# Altium PCB PCB2.PcbDoc
Units mm, origin at the board's own origin, x right, y up, seen from the top; angles counter-clockwise.
Board outline 94.61 x 96.01 mm, 2 copper layers (Top Layer, Bottom Layer); 21 components, 7 nets, 62 pads, 0 vias.
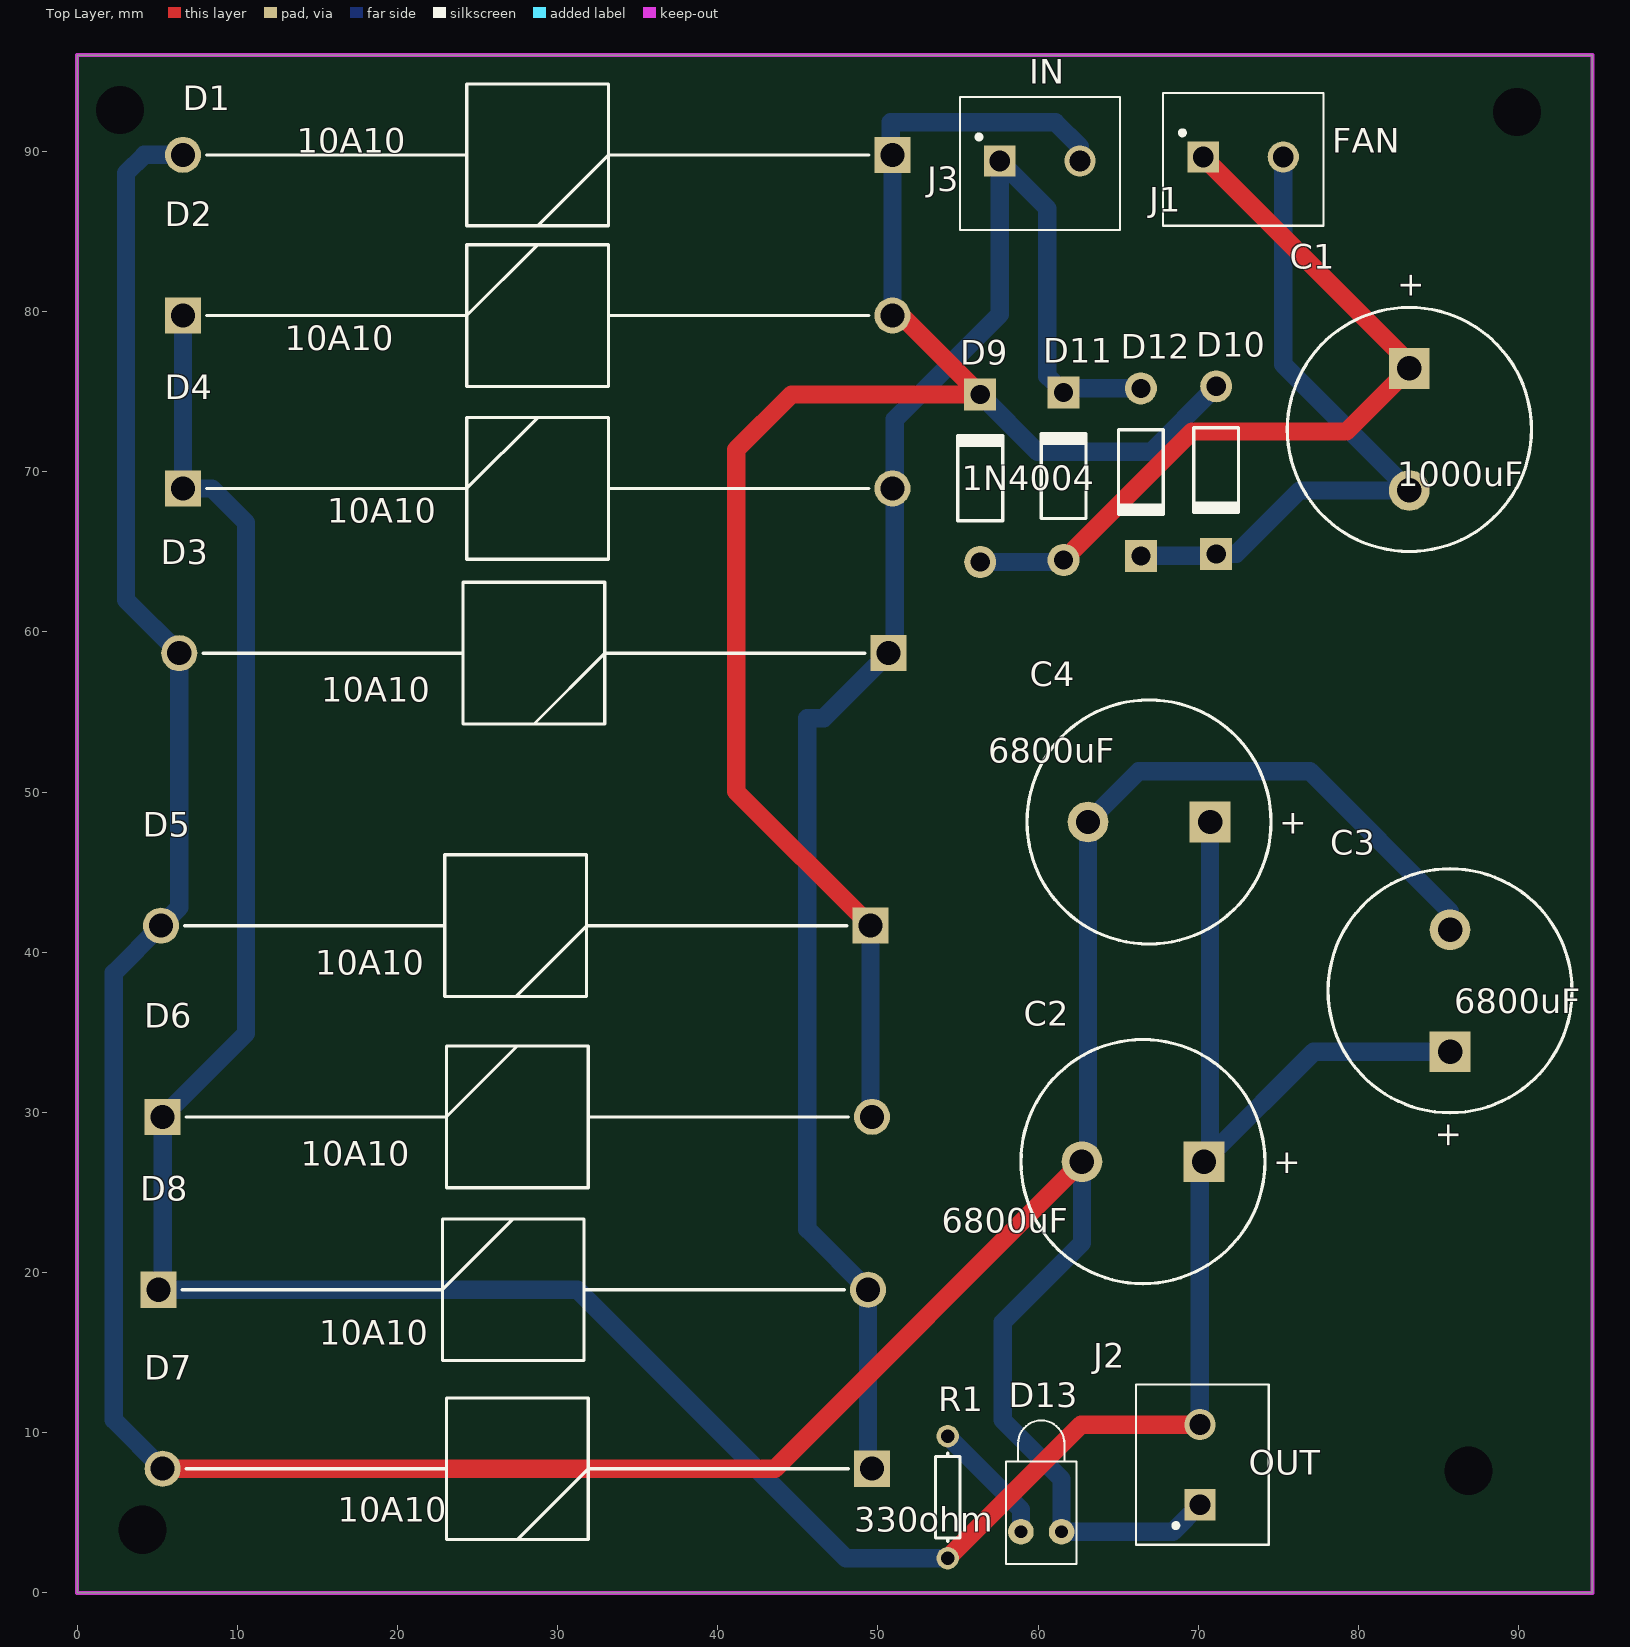
[diagram p0: Top Layer view]
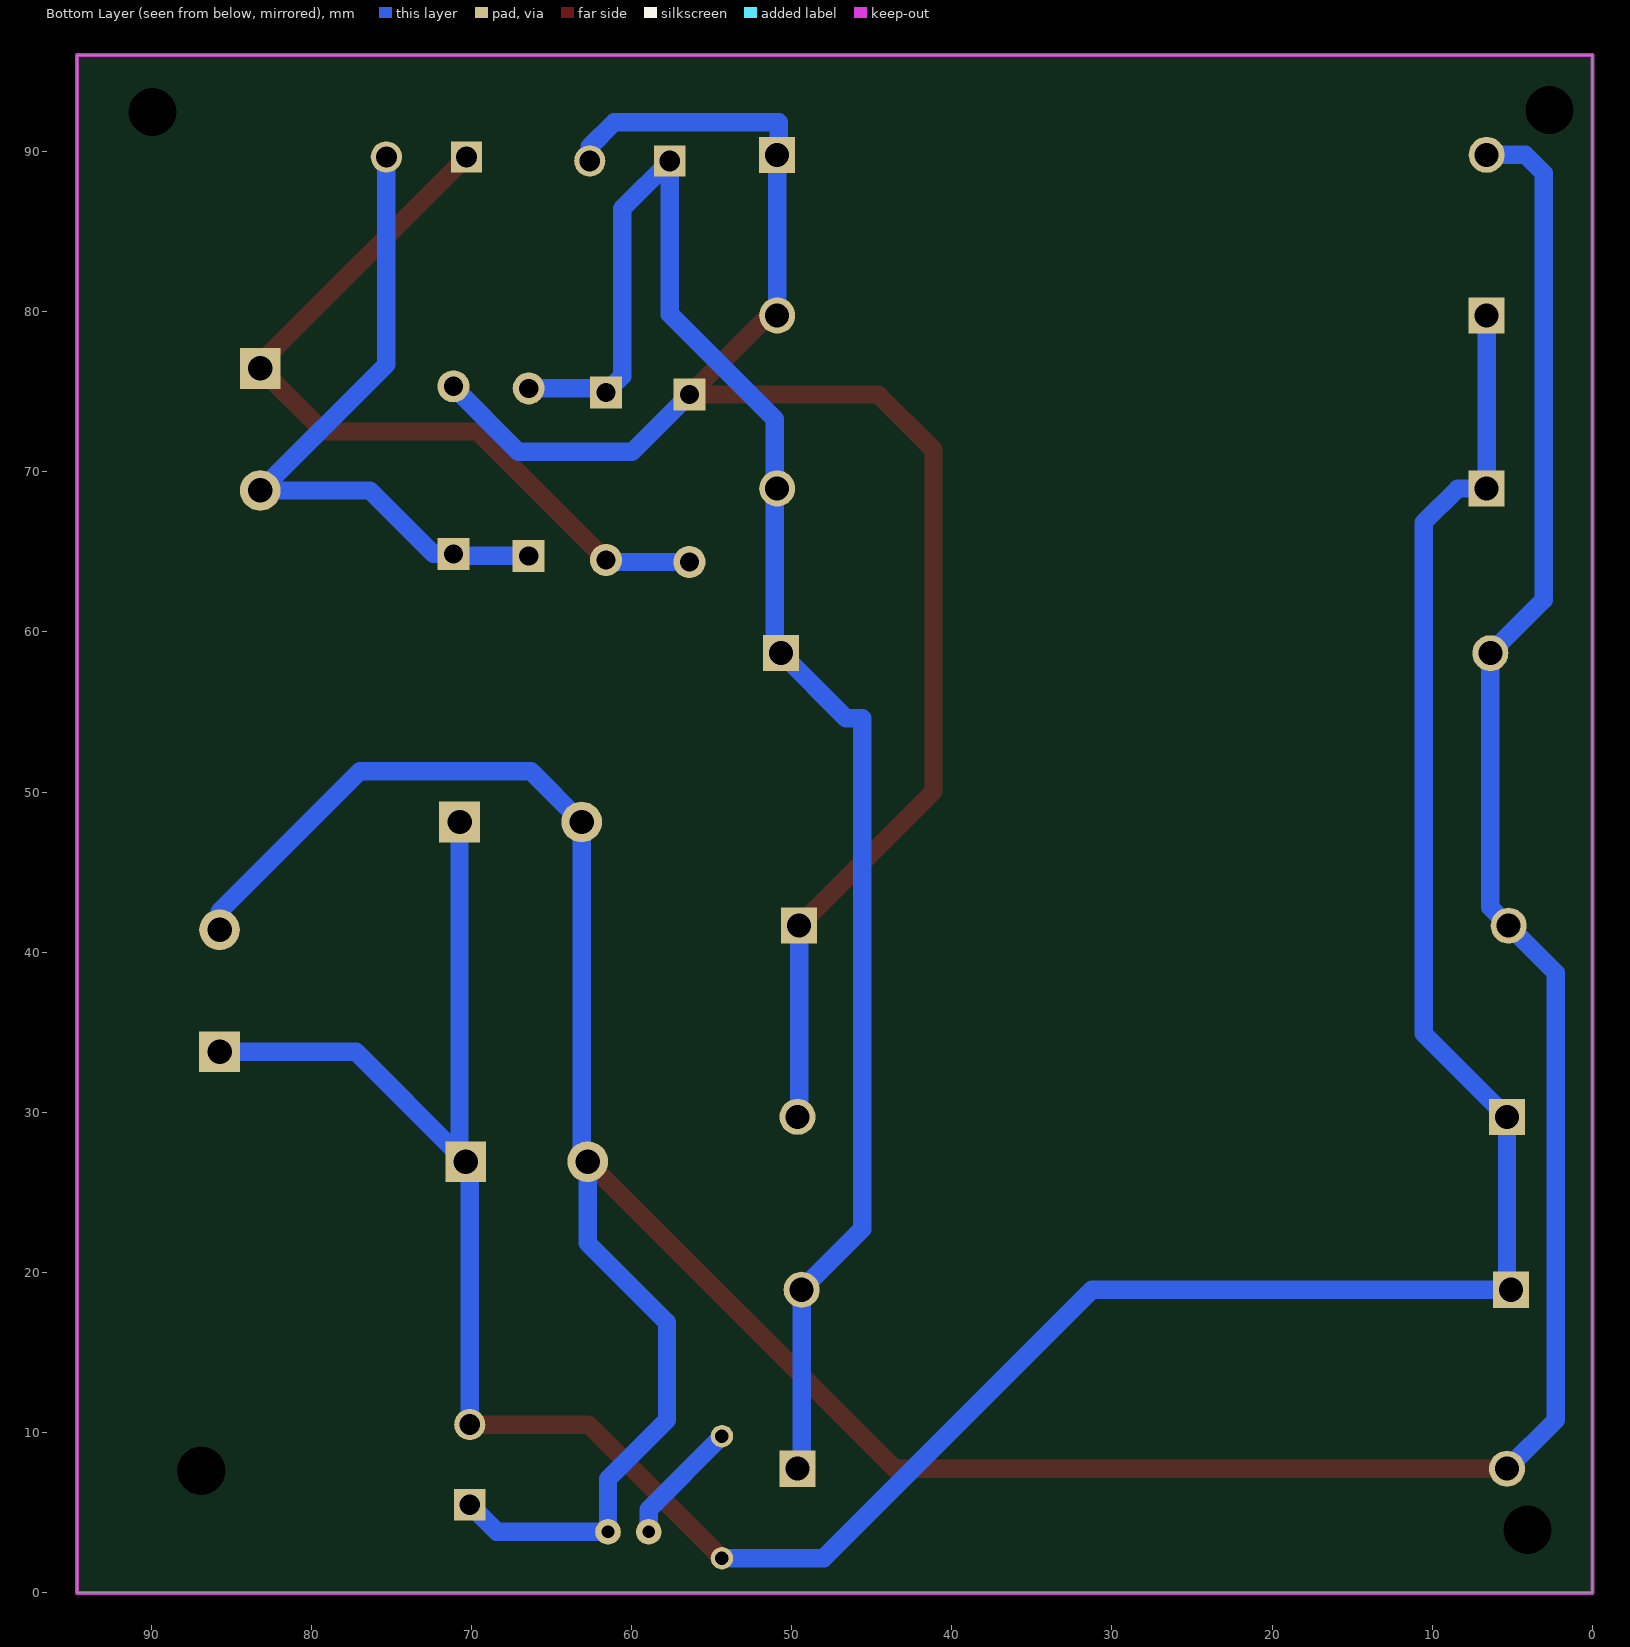
[diagram p1: Bottom Layer view, seen from below]

## Layer stack, top to bottom
Top Solder: solder mask 0.0102, Solder Resist, Dk 3.5
Top Layer: signal copper 0.0356
Dielectric 1: dielectric 0.32, FR-4, Dk 4.8
Bottom Layer: signal copper 0.0356
Bottom Solder: solder mask 0.0102, Solder Resist, Dk 3.5

## Board outline
0,0 94.615,0 94.615,96.012 0,96.012

## Design rules (kind name [scope] priority, off if disabled: settings)
Clearance [All] p1: gap=0.508 ignorepadtopadclearanceinfootprint=FALSE except(0: Arc-Hole Track-Hole SMDPad-Hole THPad-Hole Via-Hole Fill-Hole Poly-Hole Region-Hole Text-Hole)
PolygonConnect [All] p1: connectstyle=Relief reliefconductorwidth=0.254 reliefentries=4 polygonreliefangle="90 Angle" airgapwidth=0.254
RoutingVias [All] p1: holewidth=0.711 width=1.27 viastyle="Through Hole" minholewidth=0.711 minwidth=1.27 maxholewidth=0.711 maxwidth=1.27
SolderMaskExpansion [All] p1: expansion=0.102
Width [All] p1: maxlimit=1.524 minlimit=0.762 preferedwidth=1.143
30 further rules are at their usual default settings.

## Components (designator, comment, footprint, x,y, rotation, side; value= is the part's Value field where it differs from the comment)
C1 "Cap Pol1" RB7.6-15 83.185,72.644 r90 top value=1000uF
C2 "Cap Pol1" RB7.6-15 66.548,26.924 r0 top value=6800uF
C3 "Cap Pol1" RB7.6-15 85.725,37.592 r270 top value=6800uF
C4 "Cap Pol1" RB7.6-15 66.929,48.133 r0 top value=6800uF
D1 "10A01-T" DIOAD4425W130L885D885 50.904,89.789 r180 top
D2 "10A01-T" DIOAD4425W130L885D885 6.604,79.756 r0 top
D3 "10A01-T" DIOAD4425W130L885D885 50.673,58.674 r180 top
D4 "10A01-T" DIOAD4425W130L885D885 6.604,68.961 r0 top
D5 "10A01-T" DIOAD4425W130L885D885 49.53,41.656 r180 top
D6 "10A01-T" DIOAD4425W130L885D885 5.334,29.718 r0 top
D7 "10A01-T" DIOAD4425W130L885D885 49.634,7.747 r180 top
D8 "10A01-T" DIOAD4425W130L885D885 5.08,18.923 r0 top
D9 "Diode 1N4004" DO-41 56.388,69.596 r90 top
D10 "Diode 1N4004" DO-41 71.12,70.104 r270 top
D11 "Diode 1N4004" DO-41 61.595,69.723 r90 top
D12 "Diode 1N4004" DO-41 66.421,69.977 r270 top
D13 "LED" LED-1 60.198,3.81 r90 top
J1 "1935161" *PHOENIX_1935161 72.811,89.662 r0 top
J2 "1935161" *PHOENIX_1935161 70.104,8.001 r90 top
J3 "1935161" *PHOENIX_1935161 60.111,89.408 r0 top
R1 "Res1" AXIAL-0.3 54.356,5.969 r90 top value=330

## Footprints (in the part's own frame and the unit in brackets; to place one, negate y for a bottom-side part, rotate by r counter-clockwise, add the part's x,y. Pads: shape width x height; smd on the part's side, far side on the other; paste and mask are expansions set on the pad)
*PHOENIX_1935161 [mm]
  rect 1.95x1.95 hole 1.3: 1(-2.5,0)
  round 1.95 hole 1.3: 2(2.5,0)
  silkscreen extent -5,-4.3 5,4
AXIAL-0.3 [mm] "Axial Device, Thru-Hole; 2 Leads; 0.3 in Pin Spacing"
  round 1.4 hole 0.85: 1(-3.81,0) 2(3.81,0)
  silkscreen extent -2.77,-0.76 2.77,0.76
DIOAD4425W130L885D885 [mm]
  rect 2.25x2.25 hole 1.5: 1(0,0)
  round 2.25 hole 1.5: 2(44.3,0)
  silkscreen extent 1.48,-4.43 42.82,4.43
DO-41 [mm] "Diode, Axial; Body 5.2 x 2.7 mm (LxDia. max), Lead Dia. 0.86 mm (max)"
  round 2 hole 1.2: 1(-5.23,0)
  rect 2x2 hole 1.2: 2(5.23,0)
  silkscreen extent -2.65,-1.4 2.75,1.4
LED-1 [mm] "LED; 2 Leads"
  round 1.6 hole 0.8: 1(0,1.27) 2(0,-1.27)
  silkscreen extent -2,-2.2 6.95,2.2
RB7.6-15 [mil] "Polarized Capacitor (Radial); 2 Leads"
  rect 100x100 hole 60: 1(150,0)
  round 100 hole 60: 2(-150,0)
  silkscreen extent -300,-300 300,300

## Part data
C1 C2 C3 C4: "Polarized Capacitor (Radial)", LatestRevisionDate=17-Jul-2002, LatestRevisionNote="Re-released for DXP Platform.", PackageDescription="Polarized Capacitor (Radial); 2 Leads", PackageReference=RB7.6-15, Published=8-Jun-2000, Publisher="Altium Limited"
D1 D2 D3 D4 D5 D6 D7 D8: "Diode", Manufacturer_Name="Diodes Inc.", Mouser Part Number=621-10A01-T, RS Part Number=9228248, Allied_Number=70437181, Allied Price/Stock=https://www.alliedelec.com/diodes-inc-10a01-t/70437181/, Datasheet Link=https://componentsearchengine.com/Datasheets/1/10A01-T.pdf, Manufacturer_Part_Number=10A01-T, Mouser Price/Stock=https://www.mouser.com/Search/Refine.aspx?Keyword=621-10A01-T, RS Price/Stock=http://uk.rs-online.com/web/p/products/9228248
D9 D10 D11 D12: "1 Amp General Purpose Rectifier", Code_JEDEC=DO-204-AL, ComponentLink1Description="Manufacturer Link", ComponentLink1URL=http://www.fairchildsemi.com/, ComponentLink2Description=Datasheet, ComponentLink2URL=http://www.fairchildsemi.com/ds/1N%2F1N4001.pdf, DatasheetVersion=1998, LatestRevisionDate=17-Jul-2002, LatestRevisionNote="Re-released for DXP Platform.", PackageDescription="Diode, Axial; Body 5.2 x 2.7 mm (LxDia. max), Lead Dia. 0.86 mm (max)", PackageReference=DO-41, PackageVersion=Aug-1999, Published=8-Jun-2000, Publisher="Altium Limited"
D13: library part LED1, "Typical RED GaAs LED", LatestRevisionDate=08-Jul-2005, LatestRevisionNote="Mech Layer 1 removed.", PackageDescription="LED; 2 Leads", PackageReference=LED-1, Published=8-Jun-2000, Publisher="Altium Limited"
J1 J2 J3: "Conn Terminal Blocks 2 POS 5mm Solder ST Thru-Hole 16A", Package=None, Availability=Unavailable, MF="Phoenix Contact", MP=1935161, Price=None, SnapEDA_Link=https://www.snapeda.com/parts/1935161/Phoenix%20Contact/view-part/?ref=snap
R1: "Resistor", LatestRevisionDate=17-Jul-2002, LatestRevisionNote="Re-released for DXP Platform.", PackageDescription="Axial Device, Thru-Hole; 2 Leads; 0.3 in Pin Spacing", PackageReference=AXIAL-0.3, Published=8-Jun-2000, Publisher="Altium Limited"

## Free pads (board coordinates)
  round 1.524 hole 3: 2(2.667,92.583) 3(4.064,3.937) 4(86.868,7.62) 5(89.916,92.456)
  round 2 hole 1.5: 6(6.604,89.789) 7(6.604,79.756)
  round 1.524 hole 0.762: 8(6.604,68.961) 11(5.334,29.718) 12(5.08,18.923) 13(5.334,7.747) 15(49.38,18.923) 16(49.634,29.718) 18(50.673,58.674) 19(50.904,68.961) 20(50.904,79.756) 21(50.904,89.789)
  round 1.524 hole 1.5: 9(6.373,58.674) 10(5.23,41.656) 14(49.634,7.747) 17(49.53,41.656)

## Nets (pads, with @x,y where several pads share a name; then routed paths per layer and width w, separated by ;. In a path a pad name is that pad's centre, name@x,y a point inside that pad or via, vN(x,y) a via of type N, cw(c..) or ccw(c..) an arc to the next point about the centre after c; other vN are vias at no path point)
NetC1_1: C1.1 D9.1 D11.1 J1.1 | length 50.7
  Top Layer w1.143: D11.1 69.619,72.517 79.248,72.517 C1.1 83.185,76.788 J1.1
  Bottom Layer w1.143: D9.1 61.468,64.366 D11.1 ; J1.1@70.311,89.328 J1.1
NetC1_2: C1.2 D10.2 D12.2 J1.2 | length 42.5
  Bottom Layer w1.143: D12.2 70.993,64.747 D10.2 72.367,64.874 76.327,68.834 C1.2 75.311,76.708 J1.2
NetC2_1: C2.1 C3.1 C4.1 D2.1 D4.1 D6.1 D8.1 J2.2 pad.7 pad.8 pad.11 pad.12 R1.1 | length 196.8
  Top Layer w1.143: R1.1 62.698,10.501 J2.2
  Bottom Layer w1.143: pad.7 pad.8 8.405,68.961 10.541,66.825 10.541,34.925 pad.11 5.334,19.177 pad.12 31.242,18.923 48.006,2.159 R1.1 ; J2.2 70.104,26.67 C2.1 C2.1@70.739,27.305 ; C4.1 C2.1@70.739,27.305 ; C3.1 77.216,33.782 C2.1@70.739,27.305
NetC2_2: C2.2 C3.2 C4.2 D1.2 D3.2 D5.2 D7.2 D13.2 J2.1 pad.6 pad.9 pad.10 pad.13 | length 240.8
  Top Layer w1.143: pad.13 43.561,7.747 C2.2
  Bottom Layer w1.143: pad.13 2.286,10.795 2.286,38.712 pad.10 6.373,42.799 pad.9 3.048,61.999 3.048,88.646 4.191,89.789 pad.6 ; D13.2@61.468,3.692 D13.2 ; J2.1 68.413,3.81 D13.2 ; C3.2 85.725,42.545 76.962,51.308 66.294,51.308 C4.2 63.119,27.305 C2.2 62.738,21.844 57.785,16.891 57.785,10.795 61.468,7.112 D13.2
NetD1_1: D1.1 D2.2 D5.1 D6.2 D9.2 D10.1 J3.2 pad.16 pad.17 pad.20 pad.21 | length 112.7
  Top Layer w1.143: pad.17 41.148,50.038 41.148,71.374 44.6,74.826 D9.2 51.458,79.756 pad.20
  Bottom Layer w1.143: pad.17 49.53,29.822 pad.16 ; pad.20 pad.21 50.8,89.893 50.8,91.821 61.087,91.821 62.611,90.297 J3.2 ; D9.2 59.967,71.247 67.056,71.247 71.12,75.311 D10.1
NetD3_1: D3.1 D4.2 D7.1 D8.2 D11.2 D12.1 J3.1 pad.14 pad.15 pad.18 pad.19 | length 109.9
  Bottom Layer w1.143: pad.14 49.38,8.001 pad.15 45.593,22.71 45.593,54.61 46.609,54.61 pad.18 51.054,59.055 51.054,73.279 57.611,79.836 J3.1 60.579,86.44 60.579,75.969 D11.2 61.849,75.207 D12.1
NetD13_1: D13.1 R1.2 | length 7.9
  Bottom Layer w1.143: R1.2 58.928,5.207 D13.1

## Keep-outs
Keep-Out Layer:
  the board outline again, w0.254

## Silkscreen, mask and mechanical layers (free items; w line width, h text height)
Top Overlay:
  text "IN" at 59.436,94.234 h1.52
  text "10A10" at 13.716,89.916 h1.52
  text "FAN" at 78.359,89.916 h1.52
  text "10A10" at 12.954,77.597 h1.52
  text "1000uF" at 82.423,69.088 h1.52
  text "1N4004" at 55.245,68.834 h1.52
  text "10A10" at 15.621,66.802 h1.52
  text "10A10" at 15.24,55.626 h1.52
  text "6800uF" at 56.896,51.816 h1.52
  text "10A10" at 14.859,38.608 h1.52
  text "6800uF" at 85.979,36.195 h1.52
  text "10A10" at 13.97,26.67 h1.52
  text "6800uF" at 53.975,22.479 h1.52
  text "10A10" at 15.113,15.494 h1.52
  text "OUT" at 73.152,7.366 h1.52
  text "10A10" at 16.256,4.445 h1.52
  text "330ohm" at 48.514,3.81 h1.52

## Text inside footprints (layer, text, board x,y; h text height)
C1: Top Overlay "+" at 83.922,80.776 h1.5 r90
C2: Top Overlay "+" at 74.68,26.187 h1.5
C3: Top Overlay "+" at 84.988,29.46 h1.5 r270
C4: Top Overlay "+" at 75.061,47.396 h1.5
J1: Mechanical 4 "VALUE" at 67.718,83.046 h1.88; Mechanical 4 "NAME" at 67.724,94.499 h1.88; Mechanical 4 "VALUE" at 67.718,83.046 h1.88; Mechanical 4 "NAME" at 67.724,94.499 h1.88
J2: Mechanical 4 "VALUE" at 76.72,2.908 h1.88 r90; Mechanical 4 "NAME" at 65.267,2.914 h1.88 r90; Mechanical 4 "VALUE" at 76.72,2.908 h1.88 r90; Mechanical 4 "NAME" at 65.267,2.914 h1.88 r90
J3: Mechanical 4 "VALUE" at 55.018,82.792 h1.88; Mechanical 4 "NAME" at 55.024,94.245 h1.88; Mechanical 4 "VALUE" at 55.018,82.792 h1.88; Mechanical 4 "NAME" at 55.024,94.245 h1.88